# Altium PCB PCB_RP2040_2022-08-20.pcbdoc
Units mm, origin at the board's own origin, x right, y up, seen from the top; angles counter-clockwise.
Board outline 96.55 x 95.65 mm, 2 copper layers (Top Layer, Bottom Layer); 44 components, 56 nets, 771 pads, 154 vias.
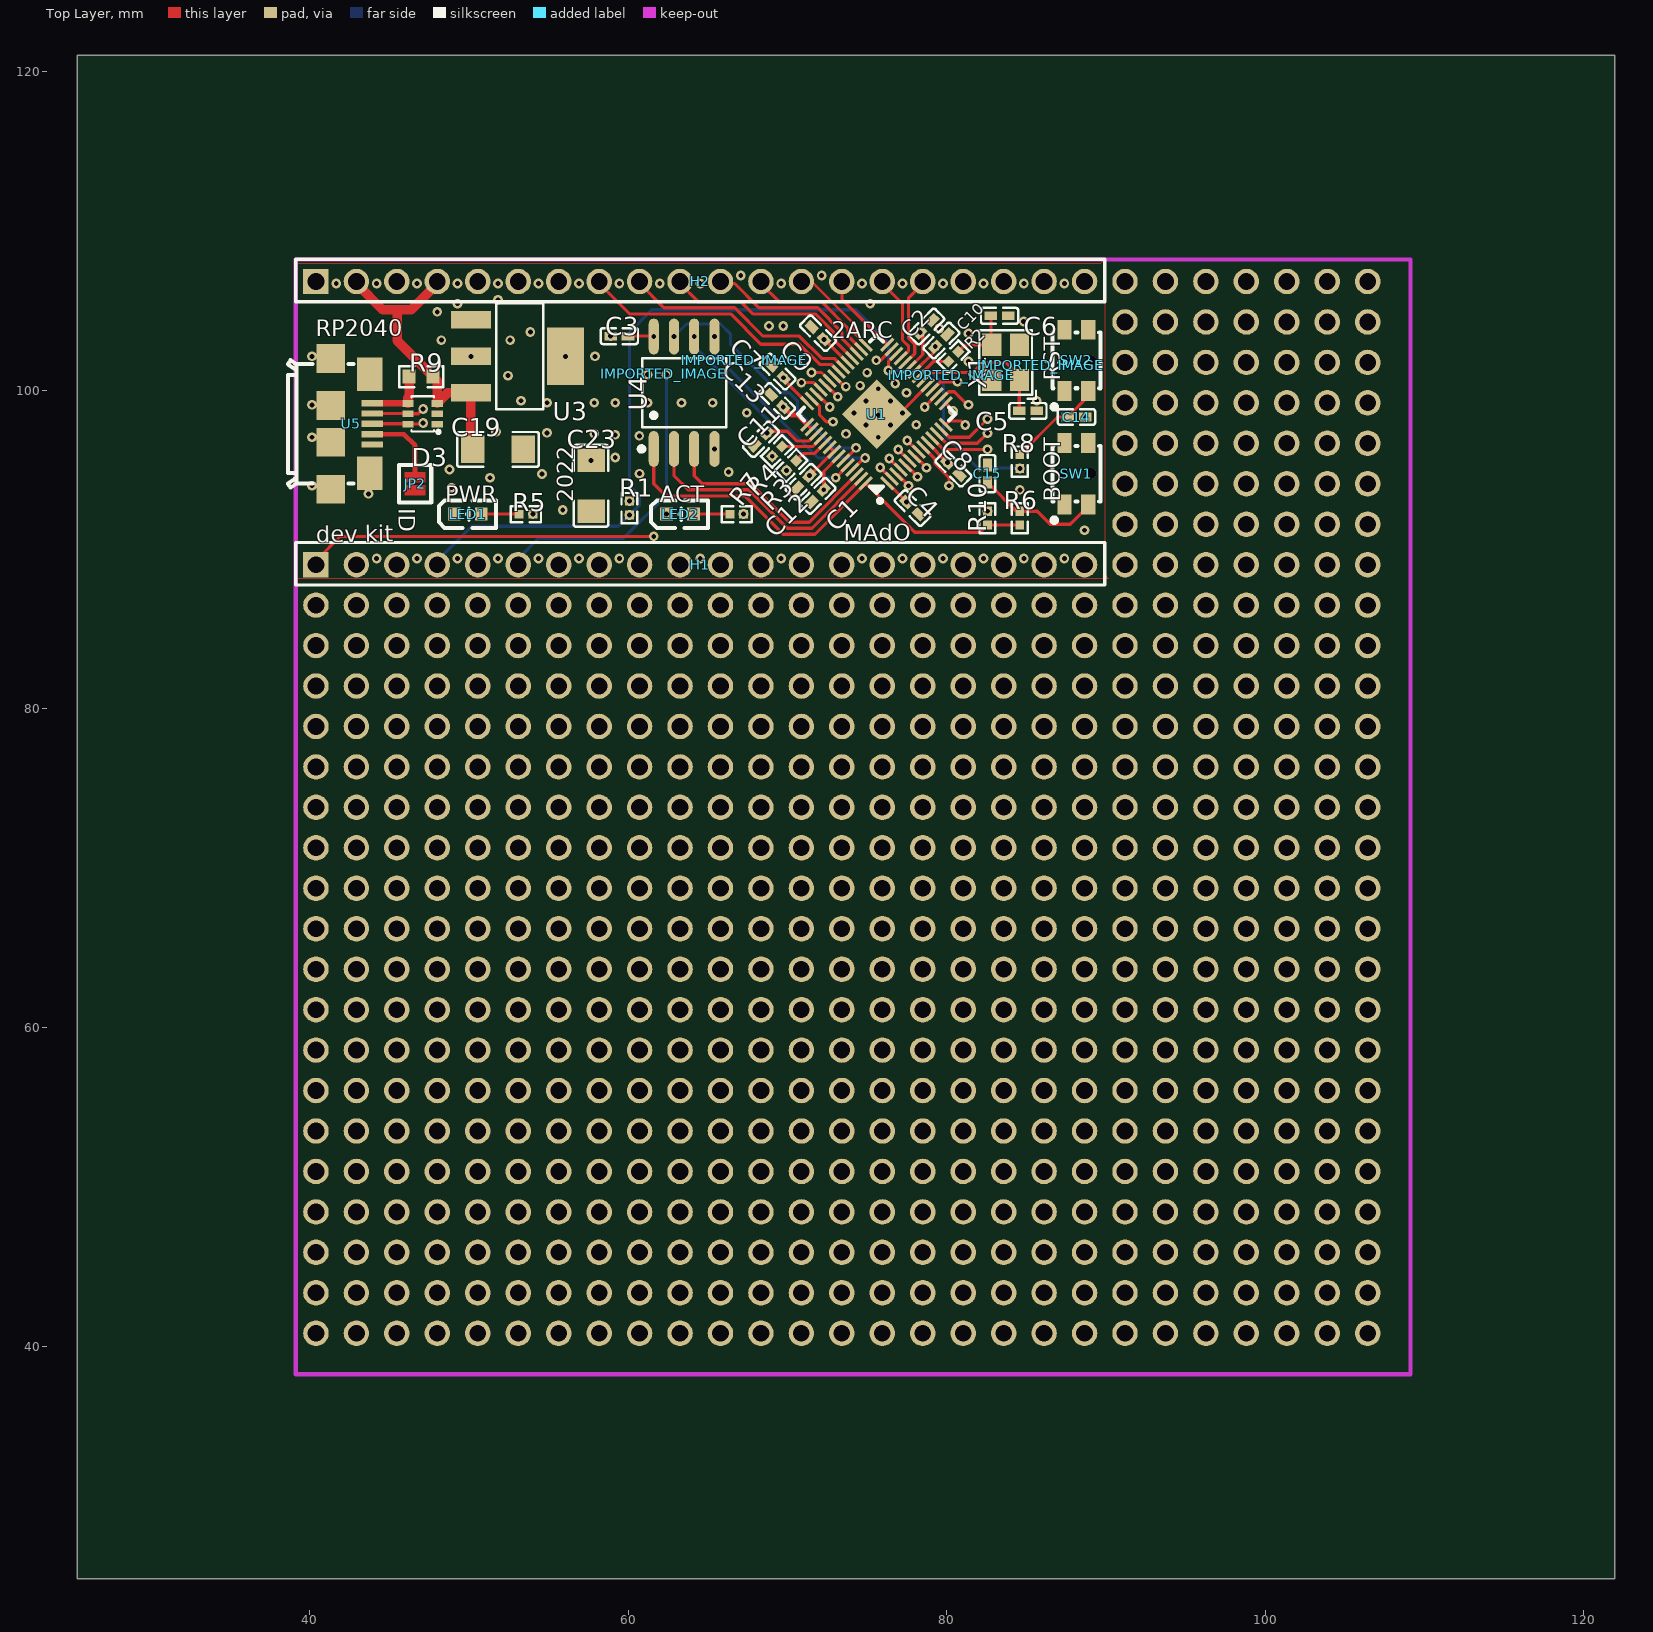
[diagram p0: Top Layer view]
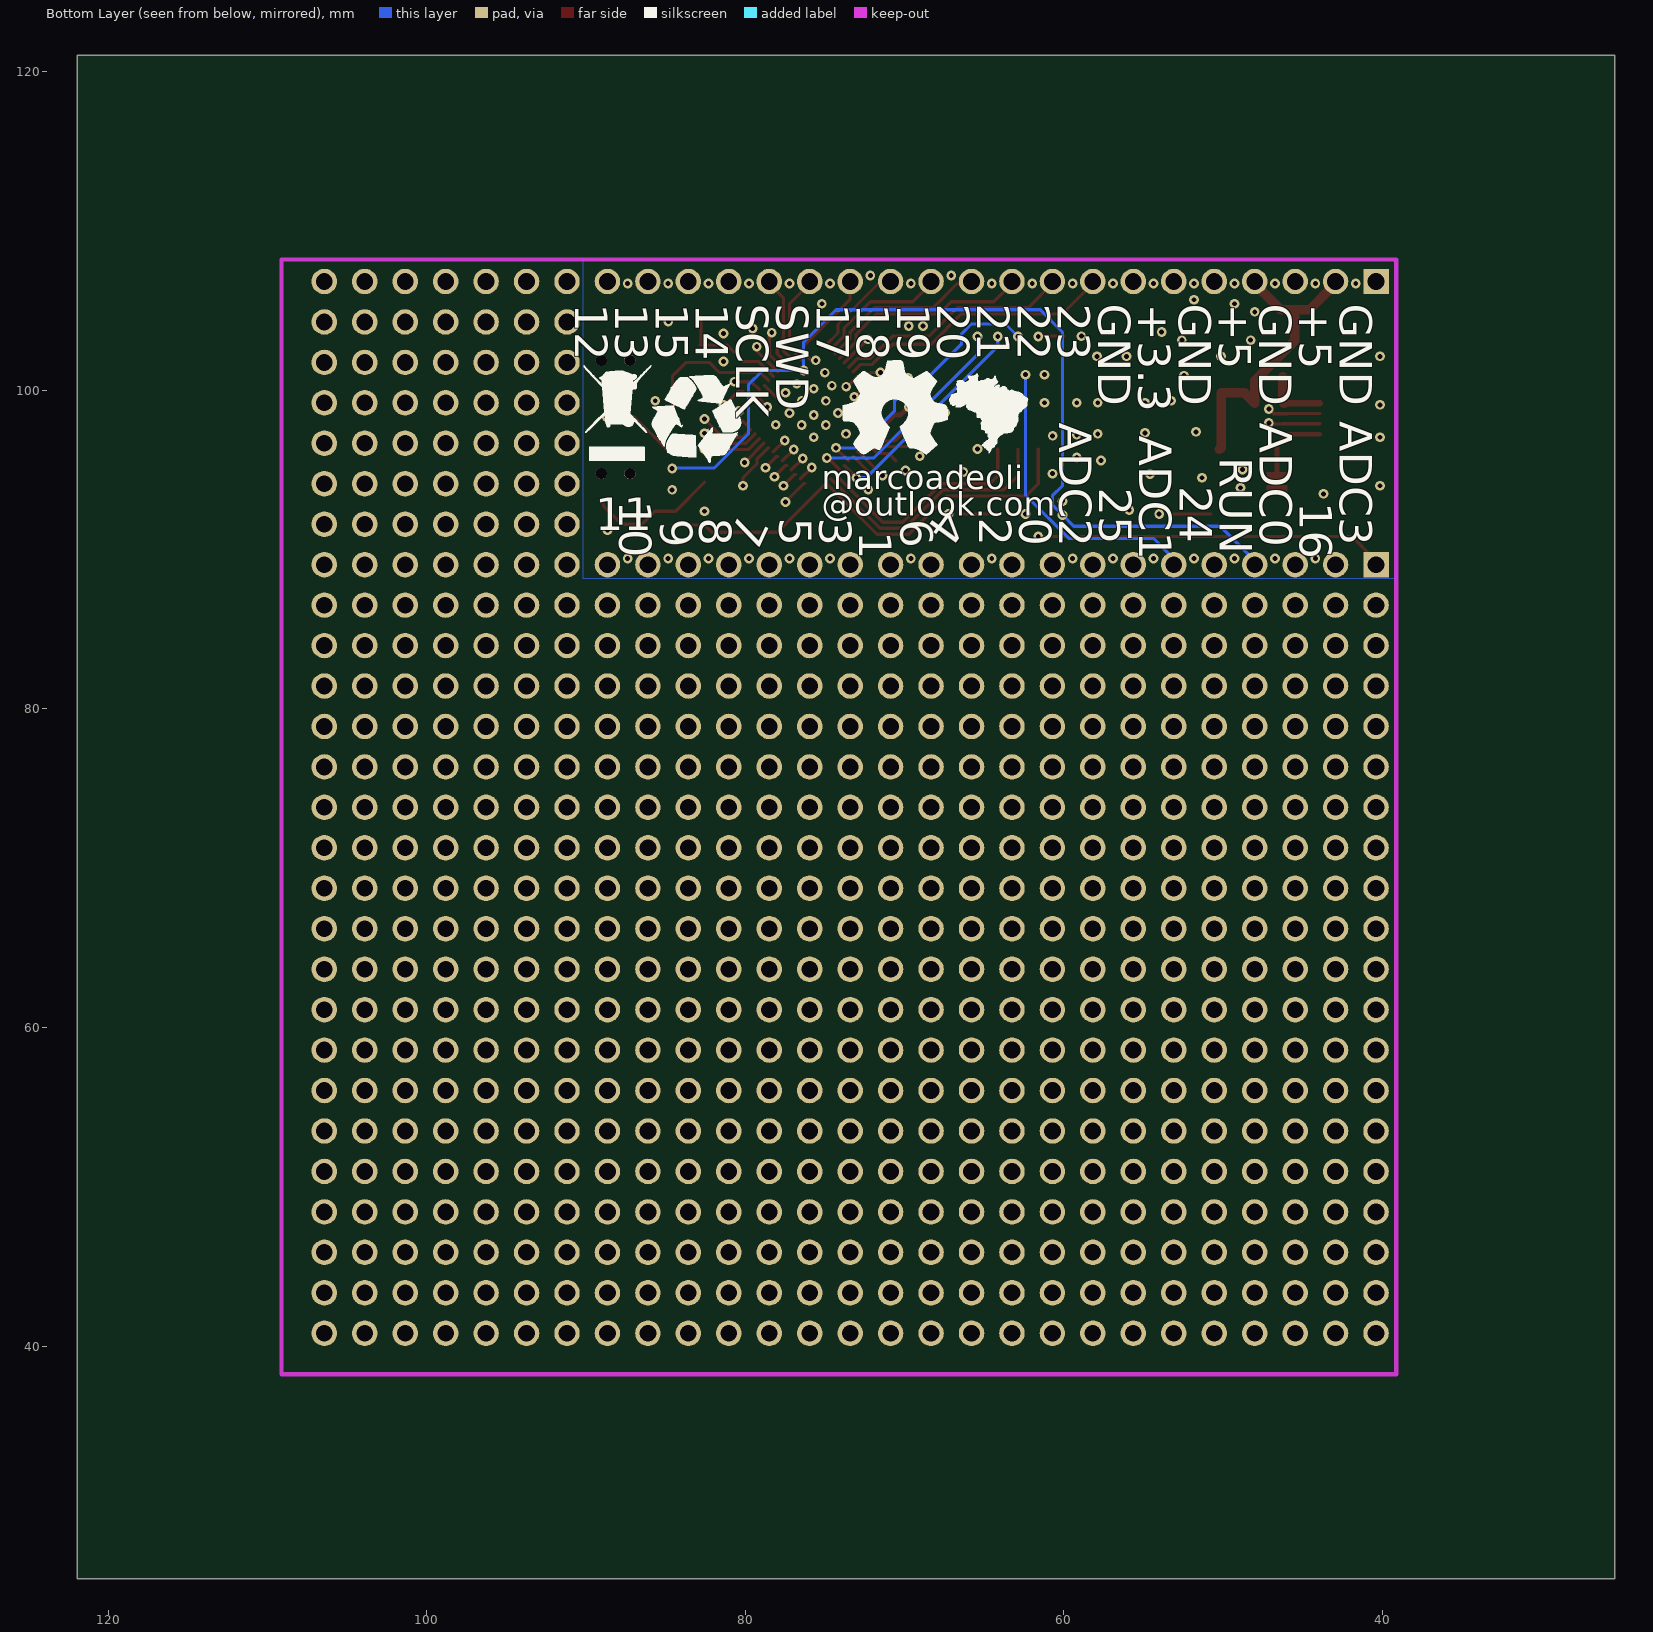
[diagram p1: Bottom Layer view, seen from below]

## Layer stack, top to bottom
Top Layer: signal copper (thickness not stored)
Dielectric: dielectric 0.32, FR-4, Dk 4.8
Bottom Layer: signal copper (thickness not stored)

## Board outline
121.952,25.4 25.4,25.4 25.4,121.054 121.952,121.054

## Components (designator, comment, footprint, x,y, rotation, side; value= is the part's Value field where it differs from the comment)
C1 "100nF" C0402_NEW 71.891,93.38 r45 top
C2 "100nF" C0402_NEW 78.72,104.018 r225 top
C3 "100nF" C0402_NEW 59.445,103.413 r0 top
C4 "100nF" C0402_NEW 77.864,92.614 r135 top
C5 "33pF" C0402 85.099,98.714 r180 top
C6 "33pF" C0402 83.321,104.683 r180 top
C7 "100nF" C0402_NEW 69.375,101.181 r315 top
C8 "100nF" C0402_NEW 80.424,95.085 r135 top
C9 "100nF" C0402_NEW 71.915,103.594 r315 top
C10 "100nF" C0402_NEW 79.665,103.136 r225 top
C11 "1uF" C0402 68.335,96.936 r225 top
C12 "100nF" C0402_NEW 71.002,94.269 r45 top
C13 "1uF" C0402 69.351,99.349 r135 top
C14 "100nF" C0402_NEW 88.147,98.333 r180 top
C15 "100nF" C0402_NEW 82.559,94.777 r270 top
C19 "10uF" C1206 51.825,96.301 r180 top
C23 "10uF" C1206 57.667,94.015 r90 top
D3 "SMF05CT1G" SOT-363_L2.0-W1.3-P0.65-LS2.1-TL 47.094,98.537 r180 top
H1 "KH-2.54PH180-1X20P-L11.5" HDR-TH_20P-P2.54-V-M 64.525,89.062 r0 top
H2 "KH-2.54PH180-1X20P-L11.5" HDR-TH_20P-P2.54-V-M 64.525,106.842 r0 top
IMPORTED_IMAGE "IMPORTED_IMAGE" IMPORTED_IMAGE 62.246,101.062 r0 top
IMPORTED_IMAGE "IMPORTED_IMAGE" IMPORTED_IMAGE 67.295,101.889 r0 top
IMPORTED_IMAGE "IMPORTED_IMAGE" IMPORTED_IMAGE 85.895,101.587 r0 top
IMPORTED_IMAGE "IMPORTED_IMAGE" IMPORTED_IMAGE 80.276,100.954 r0 top
JP2 "JUMPER-SMT_2" JUMPERS_SMT-JUMPER_2_NC_PASTE_NO-SILK 46.618,94.142 r90 top
LED1 "19-217/BHC-ZL1M2RY/3T" LED0603-R-RD_BLUE 49.927,92.237 r0 top
LED2 "19-217/BHC-ZL1M2RY/3T" LED0603-R-RD_BLUE 63.255,92.237 r0 top
R1 "10kΩ" R0402 60.08,92.618 r90 top
R2 "1kΩ" R0402 80.421,102.128 r225 top
R3 "22Ω" R0402 70.24,95.285 r45 top
R4 "22Ω" R0402 69.351,96.174 r45 top
R5 "1kΩ" R0402 53.583,92.237 r0 top
R6 "1kΩ" R0402 84.591,91.983 r270 top
R7 "1kΩ" R0402 66.811,92.237 r0 top
R8 "1kΩ" R0402 84.591,95.539 r270 top
R9 "0Ω" R0603 46.999,100.873 r0 top
R10 "10kΩ" R0402 82.559,91.983 r90 top
SW1 "TD-1182SA-2.0H-250" SW-SMD_4P-L3.5-W3.0-P1.50-LS4.6_DEALON_TD-1182SA-2.0H-250 88.147,94.777 r90 top
SW2 "TD-1182SA-2.0H-250" SW-SMD_4P-L3.5-W3.0-P1.50-LS4.6_DEALON_TD-1182SA-2.0H-250 88.147,101.889 r90 top
U1 "RP2040" LQFN-56_L7.0-W7.0-P0.4-EP 75.598,98.514 r135 top
U3 "AMS1117-3.3" SOT-223-3_L6.5-W3.4-P2.30-LS7.0-BR 53.095,102.143 r180 top
U4 "W25Q128JVSIQTR" SOIC-8_L5.3-W5.3-P1.27-LS8.0-BL 63.509,99.857 r0 top
U5 "U253-051N-4BH89-S2S" MICRO-USB-SMD_U253-051N-4BH89-S2S 42.621,97.907 r270 top
X1 "12MHz" OSC-SMD_4P-L3.2-W2.5-BL 83.702,101.762 r90 top

## Footprints (in the part's own frame and the unit in brackets; to place one, negate y for a bottom-side part, rotate by r counter-clockwise, add the part's x,y. Pads: shape width x height; smd on the part's side, far side on the other; paste and mask are expansions set on the pad)
C0402 [mm]
  rect 0.79x0.54 smd: 1(-0.545,0) 2(0.545,0)
  silkscreen extent -1.17,-0.5 1.17,0.5
C0402_NEW [mm]
  rect 0.79x0.54 smd: 1(-0.545,0) 2(0.545,0)
  silkscreen extent -1.17,-0.5 1.17,0.5
C1206 [mm]
  rect 1.485x1.728 smd: 1(-1.593,0) 2(1.593,0)
  silkscreen extent -2.56,-1.09 2.56,1.09
HDR-TH_20P-P2.54-V-M [mm]
  rect 1.6x1.6 hole 1.05: 1(-24.13,0)
  round 1.6 hole 1.05: 2(-21.59,0) 3(-19.05,0) 4(-16.51,0) 5(-13.97,0) 6(-11.43,0) 7(-8.89,0) 8(-6.35,0) 9(-3.81,0) 10(-1.27,0) 11(1.27,0) 12(3.81,0) 13(6.35,0) 14(8.89,0) 15(11.43,0) 16(13.97,0) 17(16.51,0) 18(19.05,0) 19(21.59,0) 20(24.13,0)
  silkscreen extent -25.4,-1.27 25.4,1.4
IMPORTED_IMAGE [mm]
JUMPERS_SMT-JUMPER_2_NC_PASTE_NO-SILK [mil]
  round 0 smd: 1(-16,0) 2(16,0)
  Top Layer region: -28.5,25 -3.5,25 -3.5,-25 -28.5,-25
  Top Layer region: 3.5,25 28.5,25 28.5,-25 3.5,-25
  silkscreen extent -46,-40 46,40
LED0603-R-RD_BLUE [mm]
  rect 0.8x0.8 smd: 1(0.851,0) 2(-0.851,0)
  silkscreen extent -1.82,-0.86 1.77,0.86
LQFN-56_L7.0-W7.0-P0.4-EP [mm]
  rect 1.1x0.2 smd: 1(-3.55,2.6) 2(-3.55,2.2) 3(-3.55,1.8) 4(-3.55,1.4) 5(-3.55,1) 6(-3.55,0.6) 7(-3.55,0.2) 8(-3.55,-0.2) 9(-3.55,-0.6) 10(-3.55,-1) 11(-3.55,-1.4) 12(-3.55,-1.8) 13(-3.55,-2.2) 14(-3.55,-2.6) 29(3.55,-2.6) 30(3.55,-2.2) 31(3.55,-1.8) 32(3.55,-1.4) 33(3.55,-1) 34(3.55,-0.6) 35(3.55,-0.2) 36(3.55,0.2) 37(3.55,0.6) 38(3.55,1) 39(3.55,1.4) 40(3.55,1.8) 41(3.55,2.2) 42(3.55,2.6)
  rect 0.2x1.1 smd: 15(-2.6,-3.55) 16(-2.2,-3.55) 17(-1.8,-3.55) 18(-1.4,-3.55) 19(-1,-3.55) 20(-0.6,-3.55) 21(-0.2,-3.55) 22(0.2,-3.55) 23(0.6,-3.55) 24(1,-3.55) 25(1.4,-3.55) 26(1.8,-3.55) 27(2.2,-3.55) 28(2.6,-3.55) 43(2.6,3.55) 44(2.2,3.55) 45(1.8,3.55) 46(1.4,3.55) 47(1,3.55) 48(0.6,3.55) 49(0.2,3.55) 50(-0.2,3.55) 51(-0.6,3.55) 52(-1,3.55) 53(-1.4,3.55) 54(-1.8,3.55) 55(-2.2,3.55) 56(-2.6,3.55)
  rect 3.1x3.1 smd: 57(0,0)
  silkscreen extent -4.13,-3.5 3.5,3.83
MICRO-USB-SMD_U253-051N-4BH89-S2S [mm]
  rect 0.4x1.35 smd: 1(-1.3,1.307) 2(-0.65,1.307) 3(0,1.307) 4(0.65,1.307) 5(1.3,1.307)
  rect 1.8x1.8 smd: 6(-4.1,-1.308) 6(-1.15,-1.308) 7(1.15,-1.308) 7(4.1,-1.308)
  rect 2.1x1.6 smd: 6(-3.1,1.162) 7(3.1,1.162)
  silkscreen extent -4,-3.99 4,0.13
OSC-SMD_4P-L3.2-W2.5-BL [mm]
  rect 1.4x1.2 smd: 1(-1.1,-0.875) 2(1.1,-0.875) 3(1.1,0.875) 4(-1.1,0.875)
  silkscreen extent -2.29,-1.9 2.03,1.65
R0402 [mm]
  rect 0.566x0.54 smd: 1(-0.433,0) 2(0.433,0)
  silkscreen extent -0.94,-0.5 0.94,0.5
R0603 [mm]
  rect 0.806x0.864 smd: 1(-0.753,0) 2(0.753,0)
  silkscreen extent -1.39,-0.66 1.39,0.66
SOIC-8_L5.3-W5.3-P1.27-LS8.0-BL [mm]
  oval 0.63x2.25 smd: 1(-1.905,-3.53) 2(-0.635,-3.53) 3(0.635,-3.53) 4(1.905,-3.53) 5(1.905,3.53) 6(0.635,3.53) 7(-0.635,3.53) 8(-1.905,3.53)
  silkscreen extent -2.82,-3.68 2.64,2.18
SOT-223-3_L6.5-W3.4-P2.30-LS7.0-BR [mm]
  rect 2.5x1.1 smd: 1(2.97,-2.3) 2(2.97,0) 3(2.97,2.3)
  rect 2.34x3.6 smd: 4(-2.97,0)
  silkscreen extent -1.57,-3.33 1.37,3.33
SOT-363_L2.0-W1.3-P0.65-LS2.1-TL [mm]
  rect 0.7x0.42 smd: 1(-0.92,0.65) 2(-0.92,0) 3(-0.92,-0.65) 4(0.92,-0.65) 5(0.92,0) 6(0.92,0.65)
  silkscreen extent -1.09,-1.1 0.7,1.24
SW-SMD_4P-L3.5-W3.0-P1.50-LS4.6_DEALON_TD-1182SA-2.0H-250 [mm]
  rect 1.25x0.9 smd: 1(-1.925,0.75) 2(1.925,0.75) 3(1.925,-0.75) 4(-1.925,-0.75)
  round 0.7 hole 0.7 unplated: ""(0,0.9) ""(0,-0.9)
  silkscreen extent -3.07,-1.5 1.75,1.55

## Free pads (board coordinates)
  round 1.6 hole 1.05: ""(40.395,40.802) ""(40.395,43.342) ""(40.395,45.882) ""(40.395,48.422) ""(40.395,50.962) ""(40.395,53.502) ""(40.395,56.042) ""(40.395,58.582) ""(40.395,61.122) ""(40.395,63.662) ""(40.395,66.202) ""(40.395,68.742) ""(40.395,71.282) ""(40.395,73.822) ""(40.395,76.362) ""(40.395,78.902) ""(40.395,81.442) ""(40.395,83.982) ""(40.395,86.522) ""(42.935,40.802) ""(42.935,43.342) ""(42.935,45.882) ""(42.935,48.422) ""(42.935,50.962) ""(42.935,53.502) ""(42.935,56.042) ""(42.935,58.582) ""(42.935,61.122) ""(42.935,63.662) ""(42.935,66.202) ""(42.935,68.742) ""(42.935,71.282) ""(42.935,73.822) ""(42.935,76.362) ""(42.935,78.902) ""(42.935,81.442) ""(42.935,83.982) ""(42.935,86.522) ""(45.475,40.802) ""(45.475,43.342) ""(45.475,45.882) ""(45.475,48.422) ""(45.475,50.962) ""(45.475,53.502) ""(45.475,56.042) ""(45.475,58.582) ""(45.475,61.122) ""(45.475,63.662) ""(45.475,66.202) ""(45.475,68.742) ""(45.475,71.282) ""(45.475,73.822) ""(45.475,76.362) ""(45.475,78.902) ""(45.475,81.442) ""(45.475,83.982) ""(45.475,86.522) ""(48.015,40.802) ""(48.015,43.342) ""(48.015,45.882) ""(48.015,48.422) ""(48.015,50.962) ""(48.015,53.502) ""(48.015,56.042) ""(48.015,58.582) ""(48.015,61.122) ""(48.015,63.662) ""(48.015,66.202) ""(48.015,68.742) ""(48.015,71.282) ""(48.015,73.822) ""(48.015,76.362) ""(48.015,78.902) ""(48.015,81.442) ""(48.015,83.982) ""(48.015,86.522) ""(50.555,40.802) ""(50.555,43.342) ""(50.555,45.882) ""(50.555,48.422) ""(50.555,50.962) ""(50.555,53.502) ""(50.555,56.042) ""(50.555,58.582) ""(50.555,61.122) ""(50.555,63.662) ""(50.555,66.202) ""(50.555,68.742) ""(50.555,71.282) ""(50.555,73.822) ""(50.555,76.362) ""(50.555,78.902) ""(50.555,81.442) ""(50.555,83.982) ""(50.555,86.522) ""(53.095,40.802) ""(53.095,43.342) ""(53.095,45.882) ""(53.095,48.422) ""(53.095,50.962) ""(53.095,53.502) ""(53.095,56.042) ""(53.095,58.582) ""(53.095,61.122) ""(53.095,63.662) ""(53.095,66.202) ""(53.095,68.742) ""(53.095,71.282) ""(53.095,73.822) ""(53.095,76.362) ""(53.095,78.902) ""(53.095,81.442) ""(53.095,83.982) ""(53.095,86.522) ""(55.635,40.802) ""(55.635,43.342) ""(55.635,45.882) ""(55.635,48.422) ""(55.635,50.962) ""(55.635,53.502) ""(55.635,56.042) ""(55.635,58.582) ""(55.635,61.122) ""(55.635,63.662) ""(55.635,66.202) ""(55.635,68.742) ""(55.635,71.282) ""(55.635,73.822) ""(55.635,76.362) ""(55.635,78.902) ""(55.635,81.442) ""(55.635,83.982) ""(55.635,86.522) ""(58.175,40.802) ""(58.175,43.342) ""(58.175,45.882) ""(58.175,48.422) ""(58.175,50.962) ""(58.175,53.502) ""(58.175,56.042) ""(58.175,58.582) ""(58.175,61.122) ""(58.175,63.662) ""(58.175,66.202) ""(58.175,68.742) ""(58.175,71.282) ""(58.175,73.822) ""(58.175,76.362) ""(58.175,78.902) ""(58.175,81.442) ""(58.175,83.982) ""(58.175,86.522) ""(60.715,40.802) ""(60.715,43.342) ""(60.715,45.882) ""(60.715,48.422) ""(60.715,50.962) ""(60.715,53.502) ""(60.715,56.042) ""(60.715,58.582) ""(60.715,61.122) ""(60.715,63.662) ""(60.715,66.202) ""(60.715,68.742) ""(60.715,71.282) ""(60.715,73.822) ""(60.715,76.362) ""(60.715,78.902) ""(60.715,81.442) ""(60.715,83.982) ""(60.715,86.522) ""(63.255,40.802) ""(63.255,43.342) ""(63.255,45.882) ""(63.255,48.422) ""(63.255,50.962) ""(63.255,53.502) ""(63.255,56.042) ""(63.255,58.582) ""(63.255,61.122) ""(63.255,63.662) ""(63.255,66.202) ""(63.255,68.742) ""(63.255,71.282) ""(63.255,73.822) ""(63.255,76.362) ""(63.255,78.902) ""(63.255,81.442) ""(63.255,83.982) ""(63.255,86.522) ""(65.795,40.802) ""(65.795,43.342) ""(65.795,45.882) ""(65.795,48.422) ""(65.795,50.962) ""(65.795,53.502) ""(65.795,56.042) ""(65.795,58.582) ""(65.795,61.122) ""(65.795,63.662) ""(65.795,66.202) ""(65.795,68.742) ""(65.795,71.282) ""(65.795,73.822) ""(65.795,76.362) ""(65.795,78.902) ""(65.795,81.442) ""(65.795,83.982) ""(65.795,86.522) ""(68.335,40.802) ""(68.335,43.342) ""(68.335,45.882) ""(68.335,48.422) ""(68.335,50.962) ""(68.335,53.502) ""(68.335,56.042) ""(68.335,58.582) ""(68.335,61.122) ""(68.335,63.662) ""(68.335,66.202) ""(68.335,68.742) ""(68.335,71.282) ""(68.335,73.822) ""(68.335,76.362) ""(68.335,78.902) ""(68.335,81.442) ""(68.335,83.982) ""(68.335,86.522) ""(70.875,40.802) ""(70.875,43.342) ""(70.875,45.882) ""(70.875,48.422) ""(70.875,50.962) ""(70.875,53.502) ""(70.875,56.042) ""(70.875,58.582) ""(70.875,61.122) ""(70.875,63.662) ""(70.875,66.202) ""(70.875,68.742) ""(70.875,71.282) ""(70.875,73.822) ""(70.875,76.362) ""(70.875,78.902) ""(70.875,81.442) ""(70.875,83.982) ""(70.875,86.522) ""(73.415,40.802) ""(73.415,43.342) ""(73.415,45.882) ""(73.415,48.422) ""(73.415,50.962) ""(73.415,53.502) ""(73.415,56.042) ""(73.415,58.582) ""(73.415,61.122) ""(73.415,63.662) ""(73.415,66.202) ""(73.415,68.742) ""(73.415,71.282) ""(73.415,73.822) ""(73.415,76.362) ""(73.415,78.902) ""(73.415,81.442) ""(73.415,83.982) ""(73.415,86.522) ""(75.955,40.802) ""(75.955,43.342) ""(75.955,45.882) ""(75.955,48.422) ""(75.955,50.962) ""(75.955,53.502) ""(75.955,56.042) ""(75.955,58.582) ""(75.955,61.122) ""(75.955,63.662) ""(75.955,66.202) ""(75.955,68.742) ""(75.955,71.282) ""(75.955,73.822) ""(75.955,76.362) ""(75.955,78.902) ""(75.955,81.442) ""(75.955,83.982) ""(75.955,86.522) ""(78.495,40.802) ""(78.495,43.342) ""(78.495,45.882) ""(78.495,48.422) ""(78.495,50.962) ""(78.495,53.502) ""(78.495,56.042) ""(78.495,58.582) ""(78.495,61.122) ""(78.495,63.662) ""(78.495,66.202) ""(78.495,68.742) ""(78.495,71.282) ""(78.495,73.822) ""(78.495,76.362) ""(78.495,78.902) ""(78.495,81.442) ""(78.495,83.982) ""(78.495,86.522) ""(81.035,40.802) ""(81.035,43.342) ""(81.035,45.882) ""(81.035,48.422) ""(81.035,50.962) ""(81.035,53.502) ""(81.035,56.042) ""(81.035,58.582) ""(81.035,61.122) ""(81.035,63.662) ""(81.035,66.202) ""(81.035,68.742) ""(81.035,71.282) ""(81.035,73.822) ""(81.035,76.362) ""(81.035,78.902) ""(81.035,81.442) ""(81.035,83.982) ""(81.035,86.522) ""(83.575,40.802) ""(83.575,43.342) ""(83.575,45.882) ""(83.575,48.422) ""(83.575,50.962) ""(83.575,53.502) ""(83.575,56.042) ""(83.575,58.582) ""(83.575,61.122) ""(83.575,63.662) ""(83.575,66.202) ""(83.575,68.742) ""(83.575,71.282) ""(83.575,73.822) ""(83.575,76.362) ""(83.575,78.902) ""(83.575,81.442) ""(83.575,83.982) ""(83.575,86.522) ""(86.115,40.802) ""(86.115,43.342) ""(86.115,45.882) ""(86.115,48.422) ""(86.115,50.962) ""(86.115,53.502) ""(86.115,56.042) ""(86.115,58.582) ""(86.115,61.122) ""(86.115,63.662) ""(86.115,66.202) ""(86.115,68.742) ""(86.115,71.282) ""(86.115,73.822) ""(86.115,76.362) ""(86.115,78.902) ""(86.115,81.442) ""(86.115,83.982) ""(86.115,86.522) ""(88.655,40.802) ""(88.655,43.342) ""(88.655,45.882) ""(88.655,48.422) ""(88.655,50.962) ""(88.655,53.502) ""(88.655,56.042) ""(88.655,58.582) ""(88.655,61.122) ""(88.655,63.662) ""(88.655,66.202) ""(88.655,68.742) ""(88.655,71.282) ""(88.655,73.822) ""(88.655,76.362) ""(88.655,78.902) ""(88.655,81.442) ""(88.655,83.982) ""(88.655,86.522) ""(91.194,89.062) ""(91.194,91.602) ""(91.194,94.142) ""(91.194,96.682) ""(91.194,99.222) ""(91.194,101.762) ""(91.194,104.302) ""(91.194,106.842) ""(91.195,40.802) ""(91.195,43.342) ""(91.195,45.882) ""(91.195,48.422) ""(91.195,50.962) ""(91.195,53.502) ""(91.195,56.042) ""(91.195,58.582) ""(91.195,61.122) ""(91.195,63.662) ""(91.195,66.202) ""(91.195,68.742) ""(91.195,71.282) ""(91.195,73.822) ""(91.195,76.362) ""(91.195,78.902) ""(91.195,81.442) ""(91.195,83.982) ""(91.195,86.522) ""(93.734,89.062) ""(93.734,91.602) ""(93.734,94.142) ""(93.734,96.682) ""(93.734,99.222) ""(93.734,101.762) ""(93.734,104.302) ""(93.734,106.842) ""(93.735,40.802) ""(93.735,43.342) ""(93.735,45.882) ""(93.735,48.422) ""(93.735,50.962) ""(93.735,53.502) ""(93.735,56.042) ""(93.735,58.582) ""(93.735,61.122) ""(93.735,63.662) ""(93.735,66.202) ""(93.735,68.742) ""(93.735,71.282) ""(93.735,73.822) ""(93.735,76.362) ""(93.735,78.902) ""(93.735,81.442) ""(93.735,83.982) ""(93.735,86.522) ""(96.274,89.062) ""(96.274,91.602) ""(96.274,94.142) ""(96.274,96.682) ""(96.274,99.222) ""(96.274,101.762) ""(96.274,104.302) ""(96.274,106.842) ""(96.275,40.802) ""(96.275,43.342) ""(96.275,45.882) ""(96.275,48.422) ""(96.275,50.962) ""(96.275,53.502) ""(96.275,56.042) ""(96.275,58.582) ""(96.275,61.122) ""(96.275,63.662) ""(96.275,66.202) ""(96.275,68.742) ""(96.275,71.282) ""(96.275,73.822) ""(96.275,76.362) ""(96.275,78.902) ""(96.275,81.442) ""(96.275,83.982) ""(96.275,86.522) ""(98.814,89.062) ""(98.814,91.602) ""(98.814,94.142) ""(98.814,96.682) ""(98.814,99.222) ""(98.814,101.762) ""(98.814,104.302) ""(98.814,106.842) ""(98.815,40.802) ""(98.815,43.342) ""(98.815,45.882) ""(98.815,48.422) ""(98.815,50.962) ""(98.815,53.502) ""(98.815,56.042) ""(98.815,58.582) ""(98.815,61.122) ""(98.815,63.662) ""(98.815,66.202) ""(98.815,68.742) ""(98.815,71.282) ""(98.815,73.822) ""(98.815,76.362) ""(98.815,78.902) ""(98.815,81.442) ""(98.815,83.982) ""(98.815,86.522) ""(101.354,89.062) ""(101.354,91.602) ""(101.354,94.142) ""(101.354,96.682) ""(101.354,99.222) ""(101.354,101.762) ""(101.354,104.302) ""(101.354,106.842) ""(101.354,40.802) ""(101.354,43.342) ""(101.354,45.882) ""(101.354,48.422) ""(101.354,50.962) ""(101.354,53.502) ""(101.354,56.042) ""(101.354,58.582) ""(101.354,61.122) ""(101.354,63.662) ""(101.354,66.202) ""(101.354,68.742) ""(101.354,71.282) ""(101.354,73.822) ""(101.354,76.362) ""(101.354,78.902) ""(101.354,81.442) ""(101.354,83.982) ""(101.354,86.522) ""(103.894,89.062) ""(103.894,91.602) ""(103.894,94.142) ""(103.894,96.682) ""(103.894,99.222) ""(103.894,101.762) ""(103.894,104.302) ""(103.894,106.842) ""(103.894,40.802) ""(103.894,43.342) ""(103.894,45.882) ""(103.894,48.422) ""(103.894,50.962) ""(103.894,53.502) ""(103.894,56.042) ""(103.894,58.582) ""(103.894,61.122) ""(103.894,63.662) ""(103.894,66.202) ""(103.894,68.742) ""(103.894,71.282) ""(103.894,73.822) ""(103.894,76.362) ""(103.894,78.902) ""(103.894,81.442) ""(103.894,83.982) ""(103.894,86.522) ""(106.434,89.062) ""(106.434,91.602) ""(106.434,94.142) ""(106.434,96.682) ""(106.434,99.222) ""(106.434,101.762) ""(106.434,104.302) ""(106.434,106.842) ""(106.434,40.802) ""(106.434,43.342) ""(106.434,45.882) ""(106.434,48.422) ""(106.434,50.962) ""(106.434,53.502) ""(106.434,56.042) ""(106.434,58.582) ""(106.434,61.122) ""(106.434,63.662) ""(106.434,66.202) ""(106.434,68.742) ""(106.434,71.282) ""(106.434,73.822) ""(106.434,76.362) ""(106.434,78.902) ""(106.434,81.442) ""(106.434,83.982) ""(106.434,86.522)

## Via types
v1: diameter 0.61, hole 0.305, Top Layer to Bottom Layer, tented both sides, 154 vias

## Nets (pads, with @x,y where several pads share a name; then routed paths per layer and width w, separated by ;. In a path a pad name is that pad's centre, name@x,y a point inside that pad or via, vN(x,y) a via of type N, cw(c..) or ccw(c..) an arc to the next point about the centre after c; other vN are vias at no path point)
+1.1V: C1.2 C2.2 C11.1 U1.23 U1.45 U1.50 | length 27.7
  Top Layer w0.2: v1(68.72,97.321) 68.843,97.444 69.986,97.444 70.595,96.834 71.357,96.834 U1.45 ; v1(72.276,93.765) 72.276,94.909 U1.50 ; U1.23 78.495,102.26 78.495,103.631 v1(78.334,103.633)
  Mid-Layer 2 w0.3: v1(68.72,97.321) 70.498,97.321 71.002,97.825 71.002,98.714 75.955,103.667 78.3,103.667 v1(78.334,103.633) ; v1(68.72,97.321) 70.616,97.322 72.272,95.666 v1(72.276,93.765)
+3.3V: C3.2 C4.2 C7.2 C8.2 C9.2 C10.2 C12.2 C13.1 C23.2 H2.6 R1.2 R5.2 R10.2 U1.1 U1.10 U1.22 U1.33 U1.42 U1.43 U1.44 U1.48 U1.49 U3.2 U3.4 U4.8 | length 107.6
  Top Layer w0.2: C3.2 61.578,103.413 v1(61.604,103.387) ; v1(69.76,100.795) 69.76,100.674 U1.42 ; U1.43@71.248,97.843 U1.44 ; v1(71.387,94.654) 72.878,96.145 U1.49 U1.48 ; C9.2@72.3,103.207 U1.33 ; U1.1 76.312,94.165 v1(77.479,92.999) ; U1.22 79.279,102.478 v1(79.279,102.75) ; U1.10@78.815,96.71 v1(80.038,95.47)
  Top Layer w0.3: v1(69.736,98.963) 70.24,98.46 70.631,98.46 U1.43@71.248,97.843
  Mid-Layer 2 w0.3: v1(69.736,98.963) 69.774,98.926 69.774,98.411 69.522,98.159 68.514,98.159 68.073,97.718 68.073,96.962 68.514,96.521 69.521,96.521 v1(71.387,94.654) ; v1(69.736,98.963) 69.76,100.794 72.173,103.208 v1(72.3,103.208) 74.225,103.207 76.107,105.089 78.358,105.089 79.981,105.089 80.42,104.647 80.42,103.261 79.938,102.778 79.308,102.778 v1(79.279,102.75) 79.279,96.229 v1(80.038,95.47) ; v1(77.479,92.999) 79.95,95.47 v1(80.038,95.47) ; v1(82.559,92.416) 82.559,94.269 81.357,95.47 v1(80.038,95.47)
  Mid-Layer 2 w0.5: H2.6@53.095,106.715 53.095,105.113 ; v1(54.016,92.237) 57.386,95.607 v1(57.667,95.607) ; v1(60.08,93.051) 57.667,95.464 v1(57.667,95.607) ; v1(61.604,103.387) 61.604,105.064 ; 53.095,105.113 72.272,105.113 v1@72.272,103.237 ; 53.095,105.113 v1(50.125,102.143) v1(56.065,102.143) 56.065,97.209 v1(57.667,95.607) ; v1@72.272,103.237 v1(72.3,103.208) v1@72.272,103.237
+5V: C19.2 D3.3 H2.2 H2.4 R9.2 U3.3 | length 19.3
  Top Layer w0.6: H2.2@42.935,106.715 44.586,105.064 46.364,105.064 H2.4@48.015,106.715 ; 45.51,105.064 45.51,103.115 R9.2 48.014,100.611 48.014,99.201 48.655,99.843 U3.3 50.125,96.408 C19.2
C5_2: C5.2 U1.20 X1.1 | length 9.1
  Top Layer w0.2: U1.20 79.059,101.127 81.624,101.127 82.259,101.762 83.702,101.762 84.576,100.886 84.576,100.662 C5.2@84.553,98.714
D+: D3.6 R3.1 U5.3 | length 28.8
  Top Layer w0.2: U5.3 46.004,97.907 D3.6@46.275,97.907 ; D3.6 47.061,97.887 v1(47.126,97.952)
  Mid-Layer 1 w0.2: v1(47.126,97.952) 47.334,98.158 66.252,98.158 66.775,97.635 66.775,95.783 67.773,94.782 69.099,94.782 69.29,94.973 v1@69.932,94.978
  other v1: 69.933,94.979
D-: D3.5 R4.1 U5.2 | length 28.9
  Top Layer w0.2: U5.2@43.928,98.557 D3.5@46.173,98.536 ; D3.5@45.96,98.537 D3.5@46.173,98.536 ; v1(47.126,98.841) 46.822,98.537 D3.5 ; v1(47.126,98.841) v1@47.157,98.852
  Mid-Layer 1 w0.2: v1(47.126,98.841) 47.395,98.572 66.336,98.572 67.128,97.782 67.128,95.928 67.921,95.135 68.955,95.135 69.143,95.323 69.143,95.768 v1@69.043,95.867
  other v1: 69.044,95.868
GND: C1.1 C2.1 C3.1 C4.1 C5.1 C6.1 C7.1 C8.1 C9.1 C10.1 C11.2 C12.1 C13.2 C14.1 C15.1 C19.1 C23.1 D3.2 H2.1 H2.3 H2.5 H2.7 JP2.1 LED1.2 LED2.2 SW1.3 SW2.3 U1.19 U1.57 U3.1 U4.4 U5.5 U5.6 U5.7 | length 2.4
  Top Layer w0.2: v1(77.225,98.587) 77.225,98.726 U1.19
  other v1: 44.205,89.443 46.745,89.443 49.285,89.443 51.825,89.443 54.365,89.443 56.905,89.443 59.445,89.443 64.525,89.443 69.605,89.443 74.685,89.443 77.225,89.443 79.765,89.443 82.305,89.443 84.845,89.443 87.385,89.443 88.655,91.221 62.404,92.237 55.889,92.491 43.697,93.507 84.591,93.761 40.141,94.015 51.317,94.523 54.591,94.757 60.715,94.777 66.309,94.883 48.777,95.031 59.191,95.793 65.414,96.327 40.141,97.063 75.701,97.063 60.702,97.151 59.19,97.214 57.867,97.277 73.68,97.277 54.906,97.34 51.693,97.403 74.939,97.825 76.463,97.825 78.09,97.844 88.692,98.333 75.701,98.46 74.177,98.587 67.443,98.6 40.141,99.095 54.906,99.23 57.867,99.23 59.19,99.23 61.206,99.23 63.348,99.23 65.301,99.23 74.939,99.349 76.463,99.349 53.268,99.356 85.65,99.356 77.479,99.857 75.701,100.111 74.562,100.301 76.767,100.427 61.206,100.994 75.003,101.12 81.366,101.813 40.141,102.143 57.921,102.143 48.269,103.159 52.587,103.159 58.9,103.413 81.366,103.577 53.857,103.667 79.539,103.892 68.843,104.048 69.732,104.048 84.831,104.333 48.015,104.937 49.285,105.445 75.193,105.445 51.825,105.699 41.665,106.715 44.205,106.715 46.745,106.715 49.285,106.715 51.825,106.715 54.365,106.715 56.905,106.715 59.445,106.715 61.985,106.715 64.525,106.715 69.605,106.715 74.685,106.715 77.225,106.715 79.765,106.715 82.305,106.715 84.845,106.715 87.385,106.715 67.065,107.223 72.145,107.223
GPIO0: H1.9 U1.2 | length 18.5
  Top Layer w0.2: v1(75.828,95.158) U1.2@76.552,94.447
  Mid-Layer 2 w0.2: H1.9@60.715,89.443 61.604,89.443 63.636,91.475 72.145,91.475 v1(75.828,95.158)
GPIO1: H1.13 U1.3 | length 9.7
  Top Layer w0.2: U1.3 76.89,94.731 v1(77.606,94.015)
  Mid-Layer 1 w0.2: H1.13@70.875,89.443 71.764,89.443 74.431,92.11 75.701,92.11 v1(77.606,94.015)
GPIO2: H1.10 U1.4 | length 17.8
  Top Layer w0.2: v1@76.394,95.724 U1.4
  Mid-Layer 2 w0.2: H1.10@63.255,89.443 64.652,90.84 72.78,90.84 76.717,94.777 76.717,95.399 v1@76.394,95.724
  other v1: 76.393,95.723
GPIO3: H1.14 U1.5 | length 9.1
  Top Layer w0.2: U1.5 77.455,95.296 v1(78.171,94.58)
  Mid-Layer 1 w0.2: H1.14@73.415,89.443 75.574,91.602 77.225,91.602 78.171,92.549 v1(78.171,94.58)
GPIO4: H1.11 U1.6 | length 15.8
  Top Layer w0.2: v1@76.958,96.288 U1.6
  Mid-Layer 1 w0.2: H1.11@65.795,89.443 66.684,89.443 68.589,91.348 72.145,91.348 74.177,93.38 75.32,93.38 76.958,95.018 v1@76.958,96.288
  other v1: 76.959,96.289
GPIO5: H1.15 U1.7 | length 9.1
  Top Layer w0.2: U1.7 78.021,95.862 v1(78.737,95.146)
  Mid-Layer 1 w0.2: H1.15@75.955,89.443 77.352,90.84 78.622,90.84 79.257,91.475 79.257,94.627 v1@78.736,95.145
GPIO6: H1.12 U1.8 | length 14.7
  Top Layer w0.2: v1(77.525,96.855) U1.8@78.248,96.146
  Mid-Layer 1 w0.2: H1.12@68.335,89.443 69.605,90.713 72.272,90.713 74.304,92.745 75.447,92.745 77.606,94.904 77.606,96.773 77.687,96.855 v1(77.525,96.855)
GPIO7: H1.16 U1.9 | length 8.3
  Top Layer w0.2: U1.9 79.257,95.704 79.257,95.412 80.146,94.523 v1(80.146,94.015)
  Mid-Layer 1 w0.2: H1.16@78.495,89.443 80.146,91.094 v1(80.146,94.015)
GPIO8: H1.17 U1.11 | length 11.2
  Top Layer w0.2: U1.11 79.79,96.301 ; 79.79,96.301 v1(82.559,96.301)
  Mid-Layer 1 w0.2: H1.17@81.035,89.443 81.035,94.777 v1(82.559,96.301)
GPIO9: H1.18 U1.12 | length 12
  Top Layer w0.2: U1.12 79.975,96.682 81.924,96.682 v1(82.559,97.317)
  Mid-Layer 1 w0.2: v1(82.559,97.317) 83.575,96.301 H1.18@83.575,89.443
GPIO10: H1.19 U1.13 | length 13.8
  Top Layer w0.2: U1.13 80.16,97.063 81.416,97.063 v1(82.559,98.206)
  Mid-Layer 1 w0.2: v1(82.559,98.206) 85.353,95.412 85.353,90.205 H1.19@86.115,89.443
GPIO11: H1.20 U1.14 | length 15.4
  Top Layer w0.2: U1.14@79.945,97.843 79.945,97.878 80.146,98.079 80.908,98.079 v1(81.162,97.825) ; v1@81.144,97.842 v1(81.162,97.825)
  Mid-Layer 1 w0.2: v1(81.162,97.825) 82.178,98.841 82.826,98.841 84.87,96.796 85.988,95.679 85.988,91.983 88.528,89.443 H1.20@88.655,89.443
GPIO12: H2.20 U1.15 | length 19.1
  Top Layer w0.2: U1.15@79.945,99.186 v1(80.4,98.714)
  Mid-Layer 1 w0.2: v1(80.4,98.714) 80.4,99.334 80.801,99.735 82.625,99.735 84.642,97.718 86.028,97.718 87.225,98.915 87.225,100.073 85.838,101.46 85.838,103.898 H2.20@88.655,106.715
GPIO13: H2.19 U1.16 | length 17.8
  Top Layer w0.2: U1.16@79.663,99.468 80.118,99.923 80.484,99.923 81.302,99.103 v1@81.365,99.103
  Mid-Layer 2 w0.2: v1@81.365,99.103 82.815,99.103 84.642,97.276 86.153,97.276 86.783,97.906 86.783,100.009 86.097,100.695 H2.19@86.115,106.715
  other v1: 81.366,99.104
GPIO14: H2.17 U1.17 | length 12.9
  Top Layer w0.2: v1(78.622,98.968) U1.17
  Mid-Layer 1 w0.2: v1(78.622,98.968) 78.622,101.658 76.704,103.578 76.704,104.899 77.334,105.529 79.849,105.529 H2.17@81.035,106.715
GPIO15: H2.18 U1.18 | length 18
  Top Layer w0.2: U1.18@79.098,100.034 79.616,100.553 v1(80.673,100.553)
  Mid-Layer 2 w0.2: v1@80.672,100.553 81.995,100.553 84.39,98.158 85.965,98.158 86.204,98.399 86.43,98.625 86.43,99.71 85.65,100.49 85.65,104.64 H2.18@83.575,106.715
GPIO16: H1.2 U1.27 | length 45.2
  Top Layer w0.2: v1(75.574,101.889) 75.862,101.889 U1.27
  Mid-Layer 1 w0.2: H1.2@42.935,89.443 42.935,98.714 45.475,101.254 51.512,101.254 52.071,101.813 53.897,101.813 54.276,101.434 59.252,101.434 60.136,102.316 66.267,102.316 66.694,101.889 v1(75.574,101.889)
GPIO17: H2.14 U1.28 | length 5
  Top Layer w0.2: H2.14@73.415,106.715 73.415,105.717 U1.28
GPIO18: H2.13 U1.29 | length 6
  Top Layer w0.2: H2.13@70.875,106.715 71.637,106.715 74.177,104.175 74.177,103.611 U1.29
GPIO19: H2.12 U1.30 | length 8.3
  Top Layer w0.2: H2.12@68.335,106.715 69.478,105.572 72.145,105.572 73.796,103.921 73.796,103.427 U1.30
GPIO20: H2.11 U1.31 | length 10.6
  Top Layer w0.2: H2.11@65.795,106.715 66.684,106.715 68.208,105.191 71.891,105.191 73.415,103.667 73.415,103.286 74.36,102.341 U1.31@74.36,102.298
GPIO21: H2.10 U1.32 | length 13.1
  Top Layer w0.2: H2.10@63.255,106.715 64.398,105.572 67.065,105.572 67.827,104.81 71.764,104.81 73.034,103.54 73.034,103.057 U1.32
GPIO22: H2.9 U1.34 | length 15
  Top Layer w0.2: H2.9@60.715,106.715 62.239,105.191 66.684,105.191 68.462,103.413 70.748,103.413 72.145,102.016 72.945,102.016 U1.34@73.511,101.447
GPIO23: H2.8 U1.35 | length 17.4
  Top Layer w0.2: H2.8@58.175,106.715 60.08,104.81 66.43,104.81 68.335,102.905 70.748,102.905 72.018,101.635 72.759,101.635 U1.35
GPIO24: H1.5 U1.36 | length 42.8
  Top Layer w0.2: U1.36 73.591,100.238 v1(73.669,100.238)
  Mid-Layer 1 w0.2: H1.5@50.555,89.443 44.889,95.109 44.889,98.915 46.275,100.301 53.709,100.301 54.087,99.923 67.128,99.923 67.506,99.545 70.908,99.545 71.601,100.238 v1(73.669,100.238)
GPIO25: H1.7 R7.2 U1.37 | length 47.4
  Top Layer w0.2: v1(71.51,101.127) 72.136,101.127 U1.37
  Mid-Layer 1 w0.2: v1(52.449,100.931) 59.757,100.931 60.639,101.813 64.434,101.813 64.865,101.381 71.256,101.381 v1(71.51,101.127)
  Mid-Layer 2 w0.2: v1(52.449,100.931) 52.46,100.92 52.46,92.618 55.635,89.443 57.413,91.221 60.207,91.221 62.112,93.126 66.303,93.126 67.192,92.237 v1@67.243,92.237
  other v1: 67.244,92.237
GPIO26_ADC0: H1.3 U1.38 | length 36.1
  Top Layer w0.2: U1.38 72.447,100.317 v1(73.161,99.603)
  Mid-Layer 1 w0.2: v1(48.904,93.888) 69.986,93.888 70.621,94.523 70.621,98.079 72.145,99.603 v1(73.161,99.603)
  Mid-Layer 2 w0.2: H1.3@45.475,89.443 45.475,91.221 48.142,93.888 v1(48.904,93.888)
GPIO27_ADC1: H1.6 U1.39 | length 28.9
  Top Layer w0.2: v1(70.875,100.492) 71.64,100.492 U1.39@72.098,100.034
  Mid-Layer 1 w0.2: v1(62.403,100.994) 63.978,100.994 64.48,100.492 68.208,100.492 68.589,100.111 70.494,100.111 v1(70.875,100.492)
  Bottom Layer w0.2: H1.6@53.095,89.443 54.365,90.713 59.699,90.713 62.403,93.417 v1(62.403,100.994)
GPIO28_ADC2: H1.8 U1.40 | length 21.9
  Top Layer w0.2: U1.40 71.869,99.751 v1(72.653,98.968)
  Mid-Layer 1 w0.2: H1.8@58.238,89.506 58.492,89.506 62.175,93.189 70.811,93.189 72.081,94.459 72.081,98.396 v1@72.716,99.031
GPIO29_ADC3: H1.1 U1.41 | length 41.9
  Top Layer w0.2: H1.1@40.395,89.443 40.522,89.443 41.919,90.84 v1(61.604,90.84) ; U1.41 72.018,98.983 72.018,98.46 72.445,98.033 v1(72.861,98.033)
  Mid-Layer 1 w0.2: v1(61.604,90.84) 61.985,91.221 67.7,91.221 68.33,91.852 68.716,92.237 72.018,92.237 73.796,94.015 73.796,95.539 72.861,96.474 v1(72.861,98.033)
JP2_2: JP2.2 U5.4 | length 5
  Top Layer w0.3: U5.4 45.916,97.257 46.618,96.555 JP2.2
LED1_1: LED1.1 R5.1 | length 2.4
  Top Layer w0.2: LED1.1 R5.1
QSPI_SCLK: U1.52 U4.6 | length 14
  Top Layer w0.2: v1(73.034,94.523) U1.52
  Bottom Layer w0.2: v1(64.144,103.387) 64.144,102.778 72.399,94.523 v1(73.034,94.523)
QSPI_SD0: U1.53 U4.5 | length 14.4
  Top Layer w0.2: U1.53 74.829,95.765 v1(74.877,95.765)
  Bottom Layer w0.2: v1@65.414,103.387 65.414,102.27 71.919,95.765 v1(74.877,95.765)
  other v1: 65.414,103.387
QSPI_SD1: U1.55 U4.2 | length 16.1
  Top Layer w0.2: U4.2 62.874,94.65 63.763,93.761 67.573,93.761 69.986,91.348 71.543,91.348 U1.55
QSPI_SD2: U1.54 U4.3 | length 14.3
  Top Layer w0.2: U4.3 64.144,94.65 64.652,94.142 67.7,94.142 70.113,91.729 71.357,91.729 U1.54@74.36,94.731
QSPI_SD3: U1.51 U4.7 | length 16.9
  Top Layer w0.2: U1.51 74.31,96.377 v1(74.31,96.395)
  Bottom Layer w0.2: v1(62.874,103.387) 63.661,104.175 65.795,104.175 66.43,103.54 66.43,102.905 69.478,99.857 70.113,99.857 70.621,99.349 70.621,98.714 72.94,96.395 v1(74.31,96.395)
QSPI_SS: R6.2 R10.1 U1.56 U4.1 | length 29.3
  Top Layer w0.2: U4.1 61.604,94.142 62.366,93.38 67.319,93.38 69.732,90.967 71.728,90.967 U1.56 77.997,91.094 82.102,91.094 R10.1 ; R10.1 R6.2
R2_1: C6.2 R2.1 X1.3 | length 4.1
  Top Layer w0.2: R2.1 81.155,102.862 X1.3 82.776,102.913 C6.2
R2_2: R2.2 U1.21 | length 2.3
  Top Layer w0.2: U1.21 79.189,101.822 R2.2
R3_2: R3.2 U1.47 | length 2.3
  Top Layer w0.2: R3.2 71.002,96.047 71.717,96.047 U1.47
R4_2: R4.2 U1.46 | length 2.7
  Top Layer w0.2: R4.2 71.584,96.48 U1.46
R6_1: C15.2 R6.1 SW1.4 | length 8
  Top Layer w0.2: C15.2 84.375,92.416 R6.1 85.683,92.415 86.496,91.602 87.766,91.602 88.896,92.732 SW1.4@88.896,92.852
R7_1: LED2.1 R7.1 | length 2.3
  Top Layer w0.2: LED2.1 R7.1
RUN: H1.4 R1.1 R8.2 U1.26 | length 58.5
  Top Layer w0.2: v1(76.336,101.254) 76.336,101.797 U1.26
  Bottom Layer w0.2: H1.4@48.015,89.443 48.142,89.443 50.174,91.475 59.369,91.475 v1(60.08,92.185) 60.715,92.819 60.715,93.38 60.08,94.015 60.08,103.667 61.477,105.064 74.304,105.064 76.336,103.032 v1(76.336,101.254) 78.901,101.254 79.803,100.352 79.803,97.266 81.931,95.135 84.563,95.135 v1@84.591,95.107
  other v1: 84.591,95.106
SCLK: H2.16 U1.24 | length 5.8
  Top Layer w0.2: U1.24@77.4,101.732 77.987,102.316 77.987,102.905 77.606,103.286 77.606,105.826 H2.16@78.495,106.715
SW2_4: C14.2 R8.1 SW2.4 | length 6.2
  Top Layer w0.2: R8.1 86.953,98.333 87.601,98.333 88.896,99.628 SW2.4@88.896,99.964
SWD: H2.15 U1.25 | length 5.6
  Top Layer w0.2: H2.15@75.955,106.715 77.225,105.445 77.225,103.159 77.606,102.778 77.606,102.502 U1.25
VU: D3.4 R9.1 U5.1 | length 3.9
  Top Layer w0.4: U5.1@43.928,99.207 D3.4@46.173,99.186
  Top Layer w0.6: D3.4@46.173,99.202 46.173,99.532 46.244,99.603 R9.1@46.244,100.873
pads on no net: D3.1 SW1. SW1.1 SW1.2 SW2. SW2.1 SW2.2 X1.2 X1.4

## Polygon pours and split planes (outlines as drawn)
GND on Bottom Layer (solid): 39.125,88.173 90.179,88.173 90.179,108.239 39.379,108.239 39.125,107.985
GND on Mid-Layer 2 (solid): 39.125,88.173 90.179,88.173 90.179,108.239 39.379,108.239 39.125,107.985
GND on Mid-Layer 1 (solid): 39.125,107.985 90.179,107.985 90.179,88.173 39.125,88.173
GND on Top Layer (solid): 39.125,107.985 89.671,107.985 89.925,108.239 89.925,88.427 90.179,88.173 39.125,88.173

## Silkscreen, mask and mechanical layers (free items; w line width, h text height)
Top Overlay:
  text "RP2040" at 40.395,103.405 h1.03
  text "2ARC" at 72.78,103.278 h1.03
  text "RST" at 87.139,100.619 h1.03 r90
  text "PWR" at 48.523,92.991 h1.03
  text "2022" at 56.54,92.993 h1 r90
  text "ACT" at 61.985,92.991 h1.03
  text "BOOT" at 87.139,92.999 h1.03 r90
  text "ID" at 45.594,92.618 h1.03 r270
  text "MAdO" at 73.542,90.578 h1.03
  text "dev kit" at 40.404,90.451 h1.03 r1
Bottom Overlay:
  text "GND" at 42.681,105.445 h2.03 r90
  text "+5" at 45.207,105.445 h2.03 r90
  text "GND" at 47.734,105.445 h2.03 r90
  text "+5" at 50.261,105.445 h2.03 r90
  text "GND" at 52.787,105.445 h2.03 r90
  text "+3.3" at 55.314,105.445 h2.03 r90
  text "GND" at 57.841,105.445 h2.03 r90
  text "23" at 60.367,105.445 h2.03 r90
  text "22" at 62.894,105.445 h2.03 r90
  text "21" at 65.42,105.445 h2.03 r90
  text "20" at 67.947,105.445 h2.03 r90
  text "19" at 70.473,105.445 h2.03 r90
  text "18" at 73,105.445 h2.03 r90
  text "17" at 75.527,105.445 h2.03 r90
  text "SWD" at 78.053,105.445 h2.03 r90
  text "SCLK" at 80.58,105.445 h2.03 r90
  text "14" at 83.107,105.445 h2.03 r90
  text "15" at 85.633,105.445 h2.03 r90
  text "13" at 88.16,105.445 h2.03 r90
  text "12" at 90.687,105.445 h2.03 r90
  text "ADC3" at 42.681,98.079 h2.03 r90
  text "ADC0" at 47.707,97.982 h2.03 r90
  text "ADC2" at 60.273,97.982 h2.03 r90
  text "ADC1" at 55.247,97.151 h2.03 r90
  text "RUN" at 50.221,95.802 h2.03 r90
  text "24" at 52.734,93.992 h2.03 r90
  text "25" at 57.76,93.899 h2.03 r90
  text "marcoadeoli" at 75.193,93.792 h1.5
  text "10" at 87.919,93.068 h2.03 r90
  text "16" at 45.194,92.976 h2.03 r90
  text "4" at 67.619,92.686 h2.03 r126
  text "7" at 80.284,92.426 h2.03 r115
  text "@outlook.com" at 75.193,92.122 h1.5
  text "0" at 62.787,91.997 h2.03 r90
  text "2" at 65.3,91.997 h2.03 r90
  text "3" at 75.353,91.997 h2.03 r90
  text "5" at 77.866,91.997 h2.03 r90
  text "8" at 82.893,91.997 h2.03 r90
  text "6" at 70.323,91.816 h2.03 r85
  text "9" at 85.402,91.816 h2.03 r85
  text "11" at 89.417,91.221 h2.03
  text "1" at 72.84,91.165 h2.03 r90